# Altium PCB UpperPlumbingBayBoard.PcbDoc (part 2 of 2)
Units mm, origin at the board's own origin, x right, y up, seen from the top; angles counter-clockwise.
Board outline 109.22 x 106.86 mm, 4 copper layers (Top Layer, GND, PWR, Bottom Layer), stack 1.586 mm thick; 63 components, 45 nets, 242 pads, 158 vias.
Unrouted connection lines stored in the file: 2.
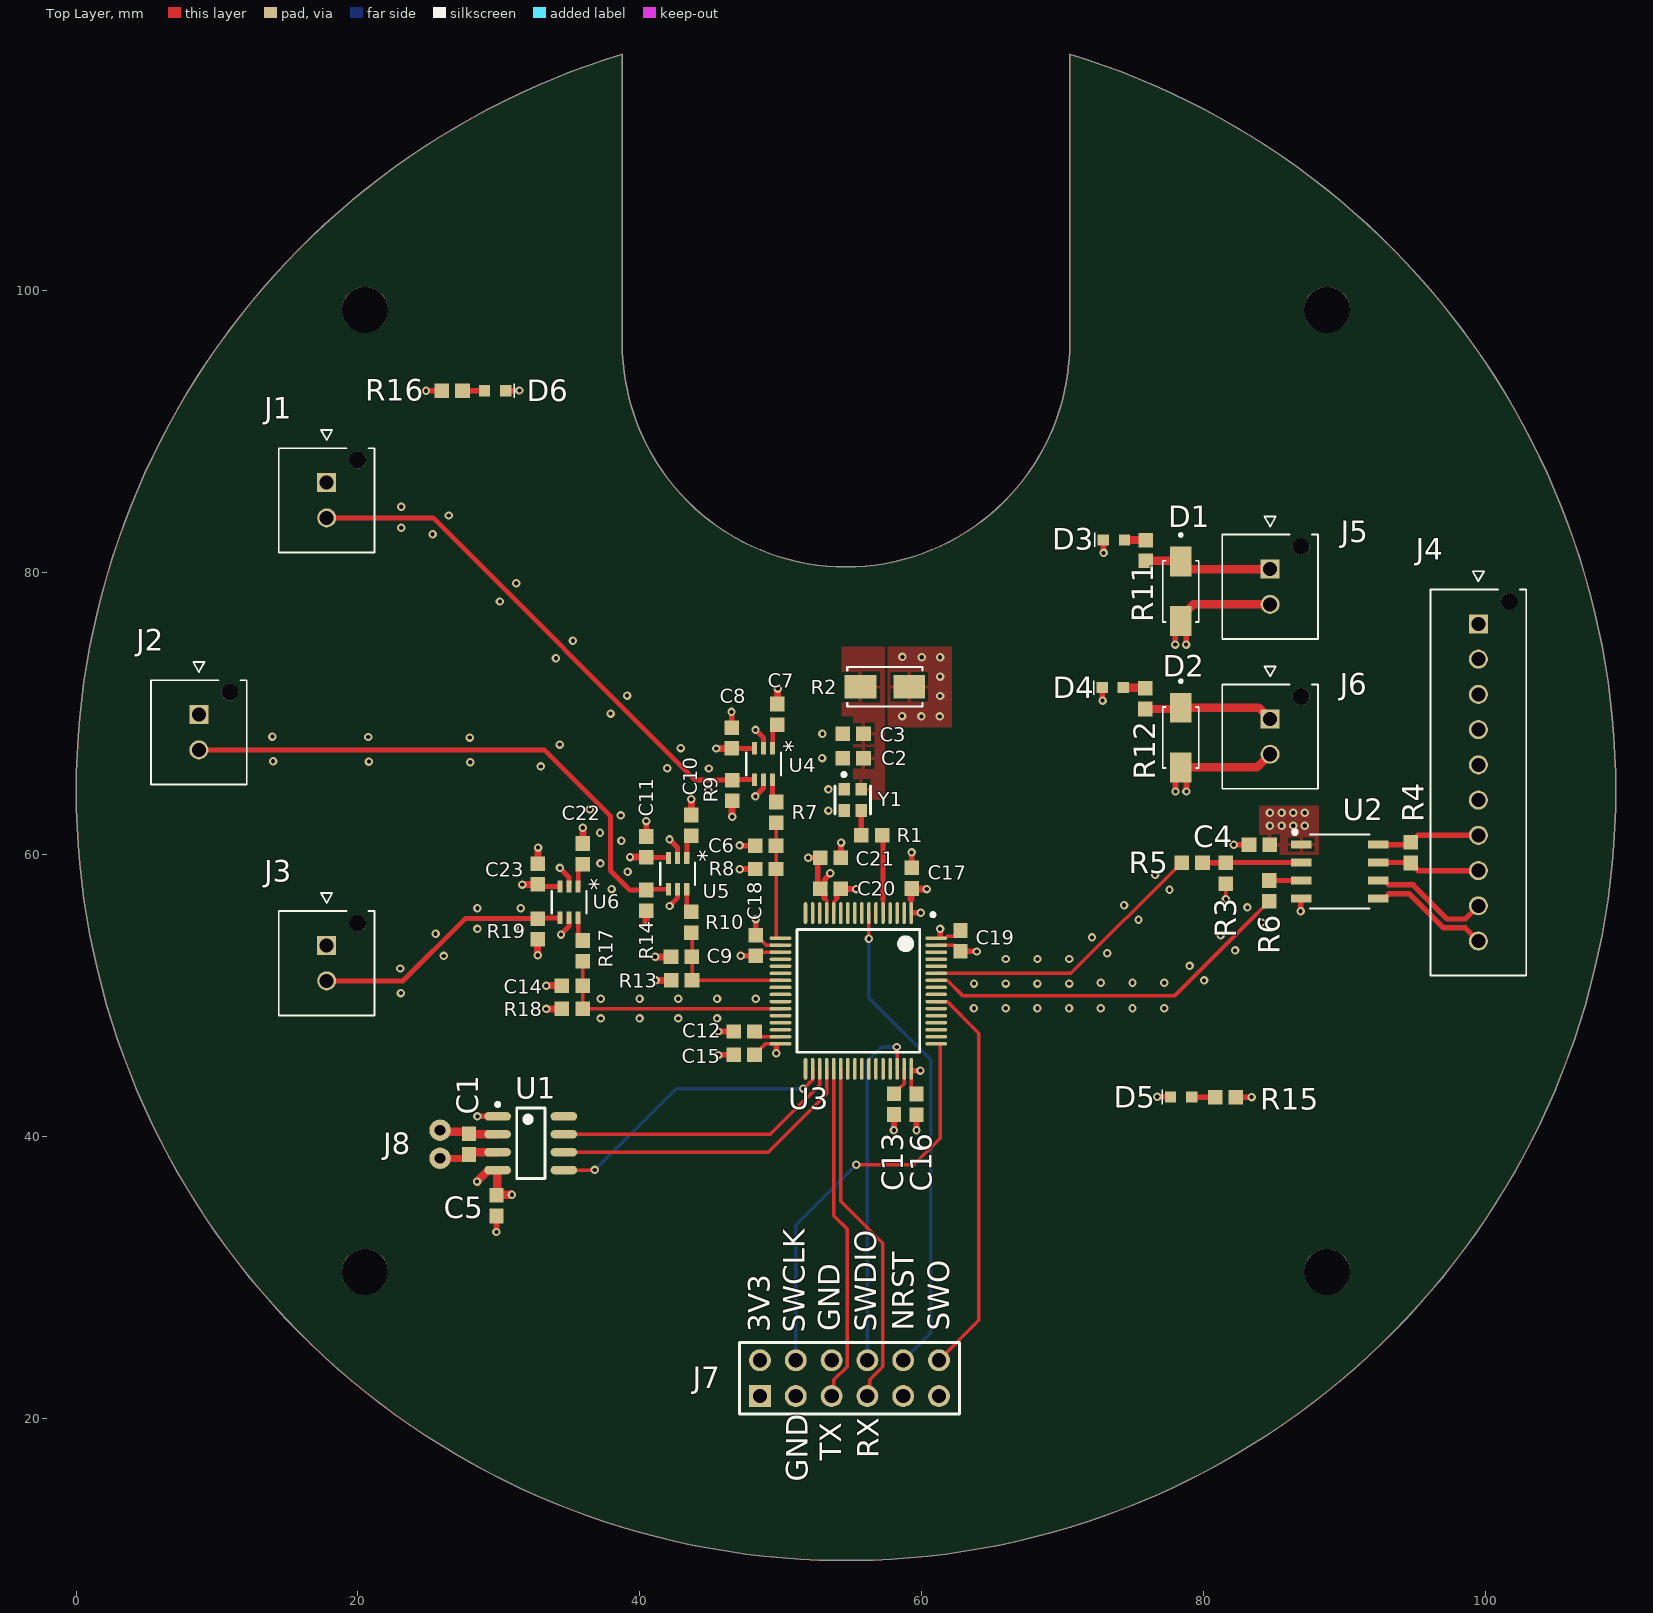
[diagram p0: Top Layer view]

## Via types
v1: diameter 0.6, hole 0.3, Top Layer to Bottom Layer, tented both sides, 158 vias

## Nets (pads, with @x,y where several pads share a name; then routed paths per layer and width w, separated by ;. In a path a pad name is that pad's centre, name@x,y a point inside that pad or via, vN(x,y) a via of type N, cw(c..) or ccw(c..) an arc to the next point about the centre after c; other vN are vias at no path point) (continued)
"SOL10 PWR": (continued)
  Top Layer w0.6: R11.1 78.325,80.815 D1.C 78.375,80.224 J5.1
  PWR w0.6: J5.1 95.605,80.224 J4.1
"SOL11 PWR": D2.C J4.2 J6.1 R12.1 | length 25.8
  Top Layer w0.6: R12.1 78.29,70.305 D2.C 83.915,70.39 J6.1 ; J4.2@99.468,73.82 J4.2
  PWR w0.6: J6.1 89.976,69.596 94.221,73.841 J4.2
SPI1_MISO: U1.U7 U3.35 | length 20.7
  Top Layer w0.25: U1.U7 49.257,40.132 52.75,43.625 U3.35
SPI1_SCK: U1.U5 U3.34 | length 21.1
  Top Layer w0.25: U1.U5 34.612,37.596 36.796,37.596 v1(36.8,37.6) ; v1(51.575,43.375) 51.636,43.375 52.25,43.989 U3.34
  Bottom Layer w0.25: v1(36.8,37.6) 42.575,43.375 v1(51.575,43.375)
SWCLK: J7.4 U3.49 | length 29.4
  Top Layer w0.25: v1(55.35,37.975) 59.425,37.975 61.3,39.85 61.3,46.55 U3.49
  Bottom Layer w0.25: J7.4 51.06,33.685 v1(55.35,37.975)
SWDIO: J7.8 U3.46 | length 25.3
  Top Layer w0.25: v1(58.225,46.325) 58.25,46.3 U3.46
  Bottom Layer w0.25: J7.8 56.14,45.315 57.15,46.325 v1(58.225,46.325)
SWO: J7.12 U3.55 | length 28.3
  Top Layer w0.25: U3.55 61.811,49.55 64.05,47.311 64.05,26.93 J7.12
"TC10 V+": C1.1 J8.1 U1.U3 | length 4.1
  Top Layer w0.5: J8.1 27.6,38.425 27.605,38.43 27.615,38.43 27.875,38.69 C1.1 ; U1.U3@29.889,38.843 U1.U3
  Top Layer w0.6: C1.1@28.018,38.843 U1.U3@29.889,38.843
"TC10 V-": C1.2 J8.2 U1.U2 | length 4.2
  Top Layer w0.6: J8.2 25.953,40.298 27.747,40.298 C1.2 27.913,40.132 U1.U2
TC10_CS!: U1.U6 U3.36 | length 22.1
  Top Layer w0.25: U1.U6 49.112,38.862 53.25,43 U3.36
TX_N: J4.9 U2.6 | length 8.6
  Top Layer w0.381: U2.6 92.825,58.14 92.914,58.051 92.914,58.046 93.137,57.823 94.856,57.823 97.27,55.408 98.556,55.408 J4.9
TX_P: J4.10 U2.5 | length 8.6
  Top Layer w0.381: U2.5 92.825,56.87 92.914,56.959 92.914,56.964 93.137,57.188 94.593,57.188 97.007,54.773 98.556,54.773 J4.10
pads on no net: J1. J2. J3. J4. J5. J6. J7.1 J7.9 J7.11 U1.U8 U3.2 U3.3 U3.4 U3.6 U3.8 U3.9 U3.10 U3.11 U3.14 U3.15 U3.16 U3.20 U3.21 U3.22 U3.24 U3.25 U3.26 U3.28 U3.29 U3.30 U3.33 U3.39 U3.40 U3.41 U3.42 U3.43 U3.44 U3.45 U3.50 U3.51 U3.52 U3.53 U3.54 U3.56 U3.57 U3.61 U3.62

## Polygon pours and split planes (outlines as drawn)
+12 on PWR "NONET_L03_P002" (solid, shelved, pour order 2): 97.325,70.075 110.275,70.075 110.275,42.125 77.325,9.175 26.7,9.175 0,35.875 0,89.4 26.925,116.325 38.748,116.325 38.748,93.248 26.913,81.413 ccw(c39.859,68.466) 21.55,68.466 21.55,44.775 21.55,41.74 ccw(c42.739,41.74) 23.121,33.734 ccw(c68.402,73.536) 33.463,24.405 ccw(c51.075,49.172) 49.631,18.816 ccw(c52.314,75.189) 64.108,19.998 ccw(c55.429,60.609) 80.193,27.273 ccw(c32.444,91.551) 96.618,43.662 ccw(c70.152,63.412) 103.117,61.446 ccw(c61.32,63.941) 103.05,67.375 102.8,67.625 97.325,67.625
+3V3 on PWR "NONET_L03_P004" (solid, shelved, pour order 4): 38.748,116.755 ccw(c54.623,64.503) 70.498,116.755 70.498,96.253 cw(c54.623,96.253) 38.748,96.253
GND on Top Layer "NONET_L01_P012" (solid, shelved, pour order 12): 38.748,116.755 ccw(c54.623,64.503) 70.498,116.755 70.498,96.253 cw(c54.623,96.253) 38.748,96.253
+3V3 on Top Layer "+3V3_L01_P011" (solid, pour order 11): 88.175,59.975 88.175,63.45 83.95,63.45 83.95,59.975
+3V3 on Top Layer "+3V3_L01_P009" (solid, pour order 9): 57.375,74.725 62.125,74.725 62.125,69 57.375,69
NetC2_2 on Top Layer "NETC2_2_L01_P007" (solid, pour order 7): 55.125,63.85 55.125,69.775 54.325,69.775 54.325,74.725 57.375,74.725 57.375,63.85
GND on GND "NONET_L02_P001" (solid, shelved, pour order 1): 38.748,116.755 ccw(c54.623,64.503) 70.498,116.755 70.498,96.253 cw(c54.623,96.253) 38.748,96.253
GND on Bottom Layer "NONET_L04_P013" (solid, shelved, pour order 13): 38.748,116.755 ccw(c54.623,64.503) 70.498,116.755 70.498,96.253 cw(c54.623,96.253) 38.748,96.253

## Silkscreen, mask and mechanical layers (free items; w line width, h text height)
Top Overlay:
  text "NRST" at 59.446,26.204 h1.52 r90
  text "SWO" at 61.946,26.204 h1.52 r90
  text "GND" at 54.196,26.154 h1.52 r90
  text "SWDIO" at 56.771,26.129 h1.52 r90
  text "3V3" at 49.196,26.104 h1.52 r90
  text "SWCLK" at 51.696,26.054 h1.52 r90
  text "RX" at 56.946,17.154 h1.52 r90
  text "TX" at 54.271,16.979 h1.52 r90
  text "GND" at 51.921,15.479 h1.52 r90
Mechanical 1:
  the board outline again, w0.013

## Text inside footprints (layer, text, board x,y; h text height)
U2: Top 3D Body "*" at 87.72,59.931 h1.27
U4: Top Overlay "*" at 49.654,68.083 h1.27 r270; Top 3D Body "*" at 48.534,67.01 h1.27 r270
U5: Top Overlay "*" at 43.554,60.308 h1.27 r270; Top 3D Body "*" at 42.434,59.235 h1.27 r270
U6: Top Overlay "*" at 35.854,58.283 h1.27 r270; Top 3D Body "*" at 34.734,57.21 h1.27 r270